# Altium PCB MBLPS_Transreceiver_PCB_2.PcbDoc
Units mm, origin at the board's own origin, x right, y up, seen from the top; angles counter-clockwise.
Board outline 69.6 x 59.69 mm, 2 copper layers (Top Layer, Bottom Layer); 32 components, 25 nets, 146 pads, 8 vias.
Unrouted connection lines stored in the file: 2.
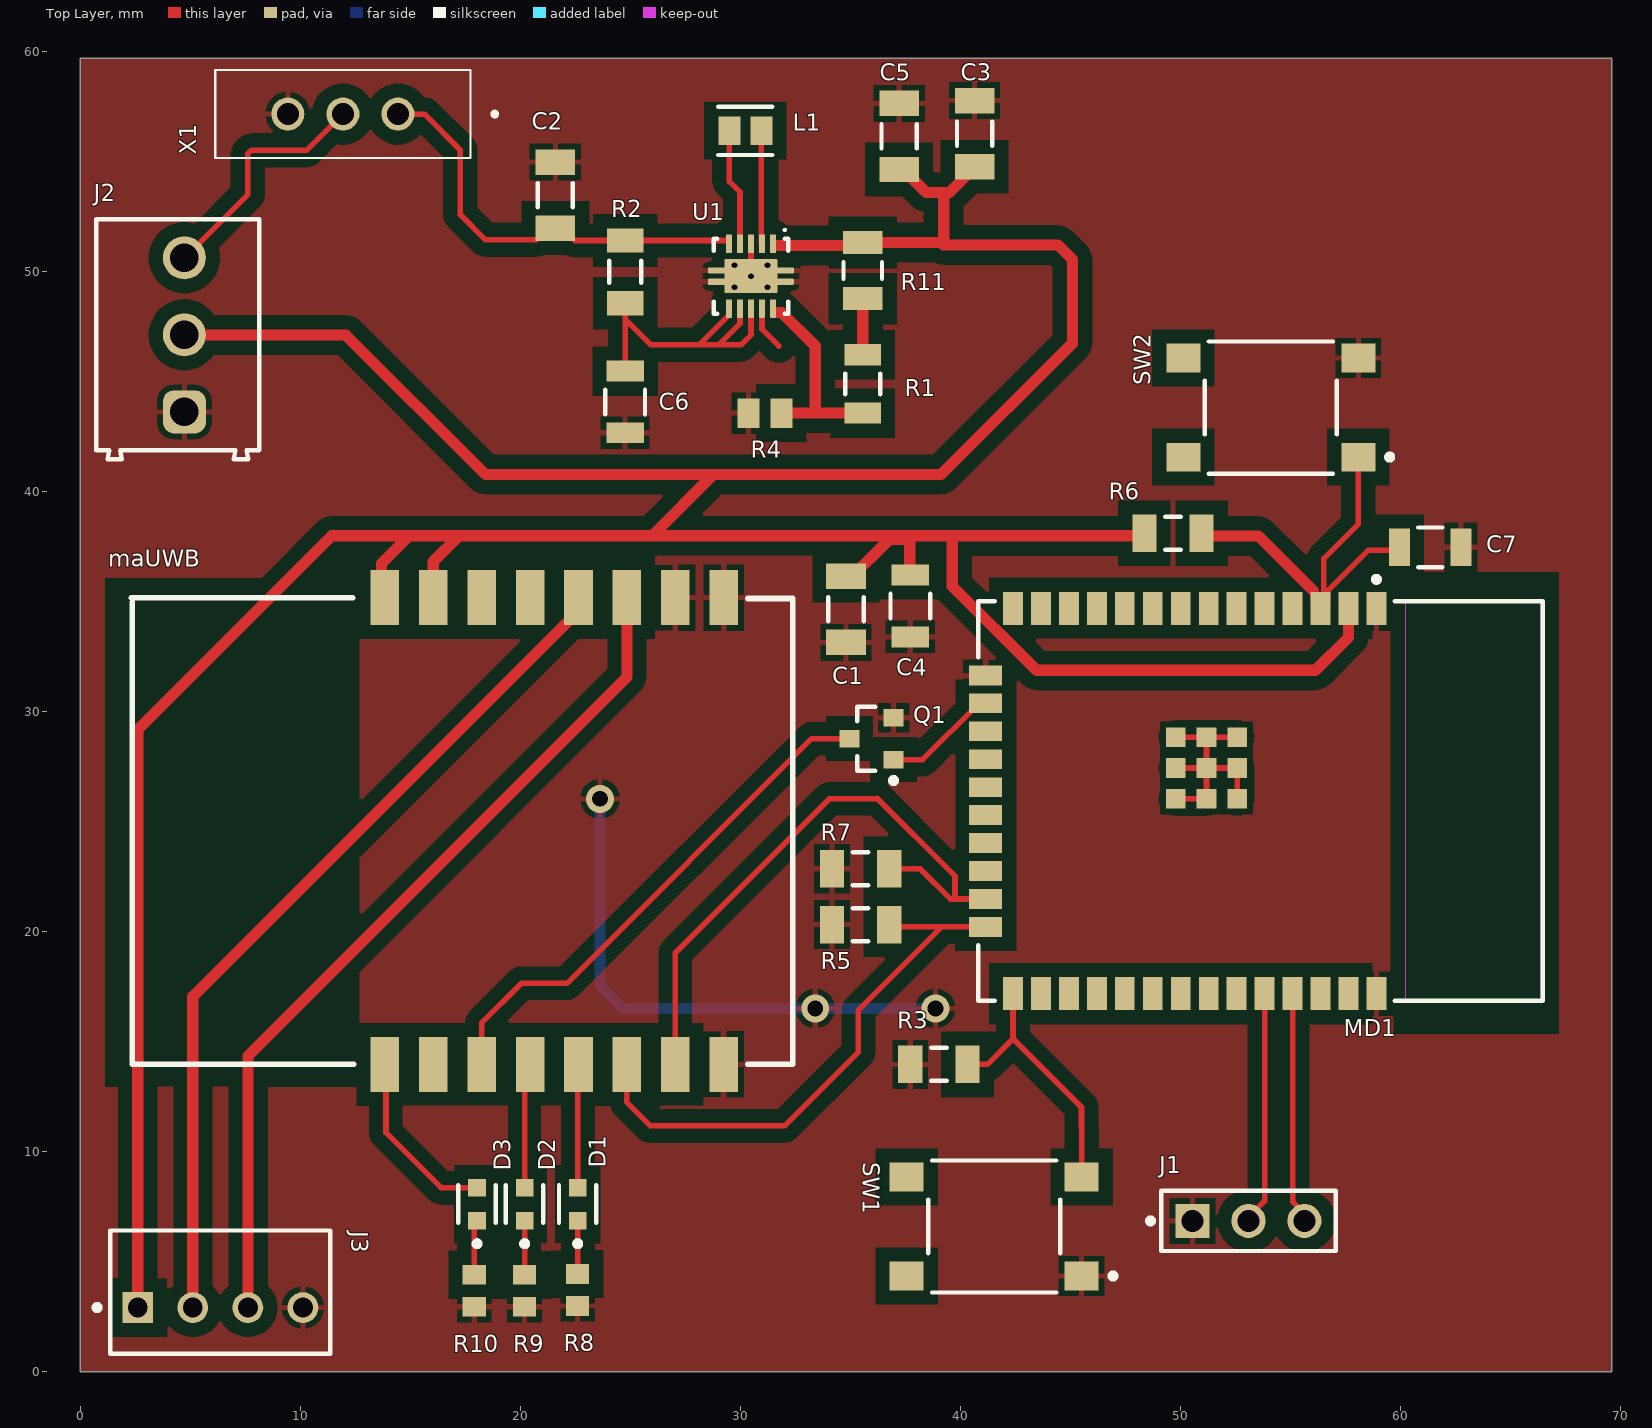
[diagram p0: Top Layer view]
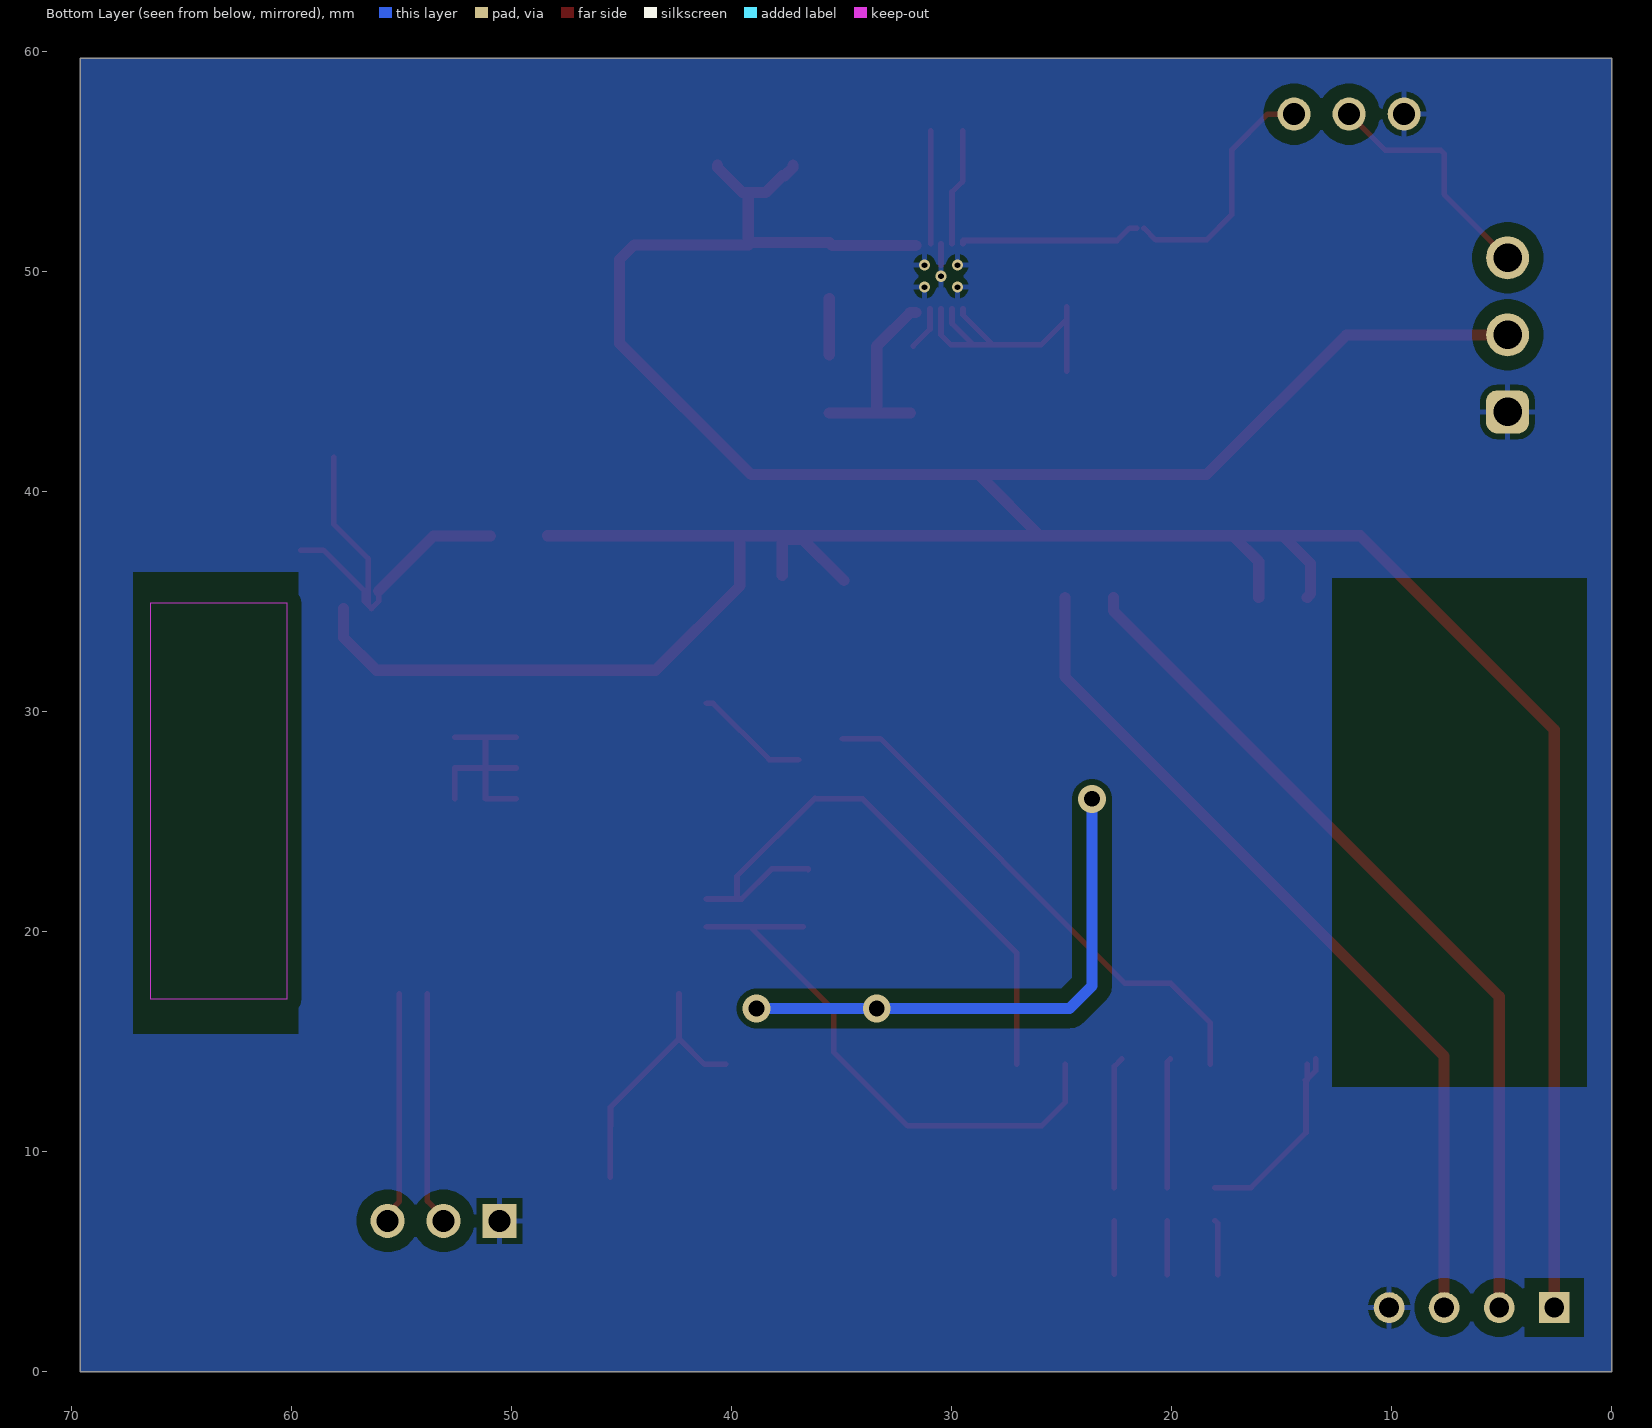
[diagram p1: Bottom Layer view, seen from below]

## Layer stack, top to bottom
Top Solder: solder mask 0.0102, Solder Resist, Dk 3.5
Top Layer: signal copper 0.0356
Dielectric 1: dielectric 0.32, FR-4, Dk 4.8
Bottom Layer: signal copper 0.0356
Bottom Solder: solder mask 0.0102, Solder Resist, Dk 3.5

## Board outline
0,59.69 0,0 69.596,0 69.596,59.69

## Design rules (kind name [scope] priority, off if disabled: settings)
Clearance Clearance_POLY [InNamedPolygon('GND_L01_P000') or InNamedPolygon('GND_L02_P001')] p1: gap=0.635 ignorepadtopadclearanceinfootprint=FALSE
Clearance [All] p2: gap=0.127 ignorepadtopadclearanceinfootprint=FALSE
HoleSize [All] p1: absolutevalues=TRUE maxlimit=6.35 minlimit=0.254 maxpercent=80.000 minpercent=20.000
MinimumSolderMaskSliver [All] p1: minsoldermaskwidth=0.076
PolygonConnect [All] p1: connectstyle=Relief reliefconductorwidth=0.254 reliefentries=4 polygonreliefangle="90 Angle" airgapwidth=0.254
RoutingVias [All] p1: holewidth=0.381 width=0.889 viastyle="Through Hole" minholewidth=0.254 minwidth=0.483 maxholewidth=0.711 maxwidth=1.27
SolderMaskExpansion [All] p1: expansion=0.102 istentingtop=FALSE
SupplyNets "Schematic Supply Nets" [InNet('GND')] p1: voltage=0.000
Width [All] p1: maxlimit=6.35 minlimit=0.127 preferedwidth=0.254
28 further rules are at their usual default settings.

## Components (designator, comment, footprint, x,y, rotation, side; value= is the part's Value field where it differs from the comment)
C1 "10uF" CAPC1206(3216)190_N 34.798,34.647 r270 top
C2 "10uF" CAPC1206(3216)190_N 21.59,53.467 r270 top
C3 "10uF" CAPC1206(3216)190_N 40.64,56.261 r270 top
C4 "0.1 uF" FP-C1206C-EB-MFG 37.719,34.798 r270 top value="0.10 μF"
C5 "10uF" CAPC1206(3216)190_N 37.211,56.134 r270 top
C6 "0.1 uF" FP-C1206C-EB-MFG 24.765,44.069 r90 top value="0.10 μF"
C7 "0.1 uF" FP-C1206C-EB-MFG 61.341,37.465 r180 top value="0.10 μF"
D1 "RX LED" FP-LTST-C190GKT-MFG 22.606,7.62 r90 top
D2 "TX LED" FP-LTST-C190GKT-MFG 20.193,7.62 r90 top
D3 "RUN LED" FP-LTST-C190GKT-MFG 18.034,7.62 r90 top
J1 "PREC003SAAN-RC" FP-PREC003SAAN-RC-MFG 53.086,6.858 r0 top
J2 "691214110003" 691214110003 4.437,47.117 r90 top
J3 "Firmware Header" FP-B4P-SHF-1AA_LF_SN-MFG 6.37,3.621 r0 top
L1 "2.2 Uh" FP-LQM21PH_G0-IPC_C 30.226,56.388 r0 top
maUWB "maUWB" PCBComponent_1 32.243,13.97 r90 top
MD1 "ESP32-WROOM-32D (8MB)" FP-ESP32-WROOM-32D_8MB-MFG 53.638,25.935 r270 top
Q1 "MMUN2233LT1G" ONSC-SOT-23-3-318-08_V 35.957,28.768 r180 top
R1 "1.1Mohm" FP-CRCW1206-e3-IPC_C 35.56,44.887 r270 top
R2 "100 Ohms" RESC3216X70X50NL05T20 24.765,49.981 r90 top
R3 "ERA8AEB103V" RESC3216X70X50LL20T25 39.019,13.97 r180 top
R4 "200 kOhms" RESC2013X60X40LL20T25 31.115,43.561 r0 top
R5 "ERA8AEB103V" RESC3216X70X50LL20T25 35.463,20.32 r180 top
R6 "ERA8AEB103V" RESC3216X70X50LL20T25 49.657,38.1 r180 top
R7 "ERA8AEB103V" RESC3216X70X50LL20T25 35.463,22.86 r180 top
R8 "1.5 kOhm" RESC1608X55X30ML15T15 22.606,3.72 r90 top
R9 "1.5 kOhm" RESC1608X55X30ML15T15 20.193,3.683 r90 top
R10 "1.5 kOhm" RESC1608X55X30ML15T15 17.907,3.683 r90 top
R11 "20 kOhm" FP-CRCW1206-e3-MFG 35.56,50.038 r90 top
SW1 "Boot Push Button" FP-PTS645SM43SMTR92LFS-MFG 41.529,6.604 r180 top
SW2 "Enable Push Button" FP-PTS645SM43SMTR92LFS-MFG 54.102,43.815 r180 top
U1 "TPS63000DRCR" DRC0010J_V 30.48,49.784 r270 top
X1 "Component_1" EG1218 14.438,57.15 r180 top

## Footprints (in the part's own frame and the unit in brackets; to place one, negate y for a bottom-side part, rotate by r counter-clockwise, add the part's x,y. Pads: shape width x height; smd on the part's side, far side on the other; paste and mask are expansions set on the pad)
691214110003 [mm] "3.50 mm Horizontal Entry Modular, 3p"
  rrect50% 1.95x1.95 hole 1.3: 1(-3.5,-0.3)
  round 1.95 hole 1.3: 2(0,-0.3) 3(3.5,-0.3)
  silkscreen extent -5.65,-3.7 5.25,3.7, body extent -5.7,-3.7 5.25,3.7, height 8.55
CAPC1206(3216)190_N [mm] "Chip Capacitor, Body 3.2x1.6mm, Height 1.9mm, IPC Medium Density"
  rect 1.15x1.8 smd: 1(-1.5,0) 2(1.5,0)
  silkscreen extent -0.55,-0.8 0.55,0.8, body extent -1.7,-0.9 1.7,0.9, height 1.9
DRC0010J_V [mm] "SON, 10-Leads, Body 3x3mm, Pitch 0.5mm, Thermal Pad 2.4x1.65mm, TI Recommended"
  rrect36% 0.85x0.28 smd paste-0.025 mask+0.07: 1(-1.475,1) 2(-1.475,0.5) 3(-1.475,0) 4(-1.475,-0.5) 5(-1.475,-1) 6(1.475,-1) 7(1.475,-0.5) 8(1.475,0) 9(1.475,0.5) 10(1.475,1)
  rrect36% 0.28x0.85 smd paste-0.025 mask+0.07: 11(-0.254,1.524) 11(-0.254,-1.524) 11(0.254,1.524) 11(0.254,-1.524)
  rrect6% 1.548x2.4 smd paste-0.825 mask+0.07: 11(0,0)
  silkscreen extent -2.15,-1.7 1.7,1.7, body extent -1.55,-1.55 1.55,1.55, height 1
EG1218 [mm]
  round 1.5 hole 1: 1(0,0) 2(2.5,0) 3(5,0)
  silkscreen extent -4.5,-2 8.3,2
FP-B4P-SHF-1AA_LF_SN-MFG [mm]
  rect 1.4x1.4 hole 0.9 paste-2539.97 mask+0: 1(-3.75,-0.7)
  round 1.4 hole 0.9 paste-2539.97 mask+0: 2(-1.25,-0.7) 3(1.25,-0.7) 4(3.75,-0.7)
  silkscreen extent -5.72,-2.8 5,2.8, body extent -5.1,-2.9 5.1,2.9, height 0.25
FP-C1206C-EB-MFG [mm]
  rect 0.95x1.7 smd paste+0 mask+0: 1(-1.4,0) 2(1.4,0)
  silkscreen extent -0.55,-0.9 0.55,0.9, body extent -2,-1 2,1, height 0.25
FP-CRCW1206-e3-IPC_C [mm]
  rect 0.956x1.658 smd paste+0 mask+0: 1(-1.326,0) 2(1.326,0)
  silkscreen extent -0.47,-0.8 0.47,0.8, body extent -1.9,-0.97 1.9,0.97, height 0.25
FP-CRCW1206-e3-MFG [mm]
  rect 1.05x1.8 smd paste+0 mask+0: 1(-1.275,0) 2(1.275,0)
  silkscreen extent -0.38,-0.87 0.38,0.87, body extent -1.9,-1 1.9,1, height 0.25
FP-ESP32-WROOM-32D_8MB-MFG [mm]
  rect 1.5x0.9 smd paste+0 mask+0: 1(-8.75,5.26) 2(-8.75,3.99) 3(-8.75,2.72) 4(-8.75,1.45) 5(-8.75,0.18) 6(-8.75,-1.09) 7(-8.75,-2.36) 8(-8.75,-3.63) 9(-8.75,-4.9) 10(-8.75,-6.17) 11(-8.75,-7.44) 12(-8.75,-8.71) 13(-8.75,-9.98) 14(-8.75,-11.25) 25(8.75,-11.25) 26(8.75,-9.98) 27(8.75,-8.71) 28(8.75,-7.44) 29(8.75,-6.17) 30(8.75,-4.9) 31(8.75,-3.63) 32(8.75,-2.36) 33(8.75,-1.09) 34(8.75,0.18) 35(8.75,1.45) 36(8.75,2.72) 37(8.75,3.99) 38(8.75,5.26)
  rect 0.9x1.5 smd paste+0 mask+0: 15(-5.71,-12.5) 16(-4.44,-12.5) 17(-3.17,-12.5) 18(-1.9,-12.5) 19(-0.63,-12.5) 20(0.64,-12.5) 21(1.91,-12.5) 22(3.18,-12.5) 23(4.45,-12.5) 24(5.72,-12.5)
  rect 0.9x0.9 smd paste+0 mask+0: 39(-2.9,-2.46) 39(-2.9,-1.06) 39(-2.9,-3.86) 39(-1.5,-1.06) 39(-1.5,-2.46) 39(-1.5,-3.86) 39(-0.1,-1.06) 39(-0.1,-2.46) 39(-0.1,-3.86)
  Keep-Out Layer region: -9,6.56 9,6.56 9,12.75 -9,12.75
  Keep-Out Layer region: -9,6.56 9,6.56 9,12.75 -9,12.75
  silkscreen extent -10.2,-12.83 9.08,12.83, body extent -9.6,-13.35 9.6,12.93, height 0.25
FP-LQM21PH_G0-IPC_C [mm]
  rect 1.006x1.308 smd paste+0 mask+0: 1(-0.726,0) 2(0.726,0)
  silkscreen extent -1.23,-1.1 1.23,1.1, body extent -1.33,-0.8 1.33,0.8, height 0.25
FP-LTST-C190GKT-MFG [mm]
  rect 0.8x0.8 smd paste+0 mask+0: 1(-0.75,0) 2(0.75,0)
  silkscreen extent -1.92,-0.85 0.85,0.85, body extent -1.25,-0.55 1.25,0.55, height 0.25
FP-PREC003SAAN-RC-MFG [mm]
  rect 1.55x1.55 hole 1 paste-2539.97 mask+0: 1(-2.54,0)
  round 1.55 hole 1 paste-2539.97 mask+0: 2(0,0) 3(2.54,0)
  silkscreen extent -4.57,-1.37 3.96,1.37, body extent -4.06,-1.47 4.06,1.47, height 0.25
FP-PTS645SM43SMTR92LFS-MFG [mm]
  rect 1.55x1.3 smd paste+0 mask+0: 1(-3.975,2.25) 2(3.975,2.25) 3(-3.975,-2.25) 4(3.975,-2.25)
  silkscreen extent -5.53,-3 3,3, body extent -4.85,-3.1 4.85,3.1, height 0.25
ONSC-SOT-23-3-318-08_V [mm] "SOT23, 3-Leads, Body 2.92x1.3mm, Pitch 0.95mm"
  rect 0.9x0.8 smd: 1(-1,0.95) 2(-1,-0.95) 3(1,0)
  silkscreen extent -1.13,-1.46 0.65,2.02, body extent -0.65,-1.46 0.65,1.46, height 1.11
PCBComponent_1 [mm]
  rect 2.5x1.3 smd: 1(21.209,18.4) 2(21.209,16.2) 3(21.209,14) 4(21.209,11.8) 5(21.209,9.6) 6(21.209,7.4) 7(21.209,5.2) 8(21.209,3) 9(0,18.4) 10(0,16.2) 11(0,14) 12(0,11.8) 13(0,9.6) 14(0,7.4) 15(0,5.2) 16(0,3)
  silkscreen extent 0,-0.13 21.21,29.92
RESC1608X55X30ML15T15 [mm] "Chip Resistor, 2-Leads, Body 1.60x0.80mm, IPC Low Density"
  rect 0.9x1.05 smd: 1(-0.725,0) 2(0.725,0)
  body extent -0.87,-0.48 0.87,0.48, height 0.55
RESC2013X60X40LL20T25 [mm] "Chip Resistor, 2-Leads, Body 2.00x1.25mm, IPC High Density"
  rect 1x1.35 smd: 1(-0.75,0) 2(0.75,0)
  body extent -1.1,-0.72 1.1,0.72, height 0.6
RESC3216X70X50LL20T25 [mm] "Chip Resistor, 2-Leads, Body 3.20x1.60mm, IPC High Density"
  rect 1.1x1.7 smd: 1(-1.3,0) 2(1.3,0)
  silkscreen extent -0.35,-0.75 0.35,0.75, body extent -1.7,-0.9 1.7,0.9, height 0.7
RESC3216X70X50NL05T20 [mm] "Chip Resistor, 2-Leads, Body 3.20x1.60mm, IPC Medium Density"
  rect 1.1x1.65 smd: 1(-1.425,0) 2(1.425,0)
  silkscreen extent -0.5,-0.72 0.5,0.72, body extent -1.63,-0.82 1.62,0.82, height 0.7

## Part data
C1 C2 C3 C5: library part CMP-1037-04961-1, "CAP 10uF 6.3V ±10% 1206 (3216 Metric) Thickness 1.9mm SMD", Case-EIA=1206, Case-Metric=3216, Rated Voltage="6.3 V", Tolerance=Â±10%, Max Thickness="1.9 mm", Technology=SMT
C4 C6 C7: library part CMP-03020-000153-1, "CAP CER 0.1UF 100V X7R 1206", Capacitance="0.10 μF", Manufacturer=KEMET, Manufacturer Part Number=C1206C104K1RACTU, Package=C1206C-EB, Temperature="-55°C to +150°C", Temperature Characteristic=X7R, Temperature Coefficient=15%, Temperature Range High=+150°C, Temperature Range Low=-55°C, Tolerance=0.1, Voltage Rating="100 V", Automotive=Yes, Automotive Grade="Grade 0", Category=Cap, ComponentLink2Description=Datasheet, ComponentLink2URL=https://content.kemet.com/datasheets/KEM_C1007_X8R_ULTRA_150C_SMD.pdf, Device Class L1="Passive Components", Device Class L2=Capacitors, Device Class L3="Ceramic Capacitors", Digikey Description="CAP CER 0.1UF 100V X7R 1206", Height=0.88mm, Ipc Land Pattern Name=CAPC320160X78, Lead Free=Yes, Material=Ceramic, Mouser Description="CAP CER 0.1UF 100V X7R 1206", Octopart=https://octopart.com/c1206c104k1ractu-kemet-89521, RoHS=TRUE
D1 D2 D3: library part CMP-22017-000005-2, "LED GREEN CLEAR CHIP SMD", Case Code (Imperial)=0603, Case Code (Metric)=1608, Color=Green, Forward Current=30mA, Forward Voltage=2.1V, Lens Color=Colorless, Max Operating Temperature=85°C, Min Operating Temperature=-55°C, Package Quantity=1, Power Dissipation=100mW, Reverse Voltage=5V, Test Current=10mA, Voltage=2V, Case/Package=0603, Depth=0.8mm, Dominant Wavelength=569nm, Height=0.8mm, Illumination Color=Green, Lead Free="Lead Free", Length=1.6mm, Lens Style=Clear, Lens Transparency=Clear, Luminous Intensity=6mcd, Mount="Surface Mount", Number of Elements=1, Number of LEDs=1, Number of Pins=2, Packaging="Tape and Reel", Power Rating=100mW, Radiation Hardening=No, Viewing Angle=130°, Wavelength=565nm, Width=0.8mm
J1: library part CMP-00595-22265080-1, "PREC003SAAN-RC Conn Header Vert 3POS 2.54MM", Color=Black, Current Rating=3A, Max Operating Temperature=105°C, Min Operating Temperature=-40°C, Connector Type="Male Pin", Contact Material="Nickel, Tin", Contact Mating Length=5.842mm, Contact Plating=Tin, Height=8.74mm, Mount="Through Hole", NexarPartId=22265080, Number of Contacts=3, Number of Positions=3, Number of Rows=1, Packaging=Bulk, Pitch=2.54mm, RoHS=Compliant, Termination=Solder
J2: library part CMP-1502-02466-2, Color="Blue, Green", Current=10A, Max Operating Temperature=105°C, Min Operating Temperature=-40°C, Voltage=300V, Contact Material=Brass, Contact Plating="Brass, Tin", Current Rating=10A, Height=12.2mm, Housing Material=Nylon, Lead Pitch=3.5mm, Length=7.4mm, Mount="Through Hole", NexarPartId=18818289, Number of Contacts=3, Number of Levels=1, Number of Pins=3, Number of Positions Per Level=3, Packaging=Box, Pitch=3.5052mm, Plating="Brass, Steel", REACH SVHC=Unknown, RoHS=Compliant, Stripping Length=-6mm, Termination=Screw, Voltage Rating=300V, Width=10.9mm, Wire Gauge (Max)=24AWG, Wire Gauge (Min)=16AWG, Wire/Cable Gauge=24AWG
J3: library part CMP-17439-000200-1, "CONN HEADER VERT 4POS 2.5MM", Color=Natural, Contact Resistance=20mR, Current Rating=3A, Flammability Rating="UL94 V-0", Max Operating Temperature=85°C, Max Voltage Rating (AC)=250V, Min Operating Temperature=-25°C, Connector Type=Header, Contact Finish - Mating=TIN, Contact Material=Brass, Contact Mating Length=0.236inch, Contact Plating=Tin, Contact Shape=Square, Contact Type="Male Pin", Depth=5.6mm, Fastening Type=Friction, Housing Color=Natural, Housing Material=Polyamide, Insulation Color=Natural, Insulation Material=Nylon, Lead Free="Lead Free", Mated Stacking Heights=14.9mm, Max Current Rating=3A, Mount="Through Hole", Number of Contacts=4, Number of Positions=4, Number of Rows=1, Orientation=Straight, Packaging=Bulk, Pitch=2.5mm, Series=NH, Termination=Solder, Voltage Rating=250V
L1: library part CMP-06042-016317-1, "Multilayer Type Inductor for Power Lines, 0805 (2012), 2.2μH, 30%, 0.288Ω, 0.8A", Case Code (Imperial)=0805, Case Code (Metric)=2012, Current Rating=800mA, DC Resistance (DCR)=288mR, Inductance=2.2uH, Inductance Tolerance=30%, Max Operating Temperature=125°C, Min Operating Temperature=-55°C, Package Quantity=4000, Self Resonant Frequency=40MHz, Test Frequency=1MHz, Case/Package=0805, Core Material=Ferrite, DC Current=800mA, Depth=1.4mm, Height=0.9mm, Height - Seated (Max)=0.039inch, Lead Free="Lead Free", Length=2mm, Max DC Current=800mA, Military Standard=Not, Mount="Surface Mount", Packaging="Tape and Reel", Radiation Hardening=No, REACH SVHC="No SVHC", RoHS Compliant=Yes, Series=LQM, Shielding=Shielded, Termination=SMD/SMT, Tolerance=30%, Width=0.049inch
MD1: library part CMP-194065-000011-1, "RX TXRX MOD WIFI TRACE ANT SMD", Case/Package=SMD/SMT, Frequency=2.5GHz, Max Operating Temperature=85°C, Min Operating Temperature=-40°C, Data Rate=150Mbps, Interface=I2C, Memory Size=536KB, Mount="Surface Mount", Packaging="Tape and Reel", Sensitivity=-98dBm
Q1: library part CMP-0630-00250-1, "Digital Transistor (BRT), R1=4.7 kOhm, R2=47 kOhm, NPN Transistor, 3-Pin SOT-23, Pb-Free, Tape and Reel", Manufacturer="On Semiconductor", ComponentLink1Description="Manufacturer URL", ComponentLink1URL=http://www.onsemi.com/, ComponentLink2Description=Datasheet, ComponentLink2URL=http://www.onsemi.cn/pub_link/Collateral/DTC143Z-D.PDF, ComponentLink3Description="Package Specification", ComponentLink3URL=http://www.onsemi.cn/pub_link/Collateral/318-08.PDF, DatasheetVersion="Rev. 4", hFE Min=80, IC Continuous (A)=0.1, Mounting Technology="Surface Mount", PackageDescription="3-Pin Small Outline Transistor, Body 2.92 x 1.3 mm, Pitch 0.95 mm", PackageReference=SOT-23-3-318-08, PackageVersion="Rev. AP, 11/2009", Packing="Tape and Reel", PartNumber=MMUN2233LT1G, Polarity=NPN, RoHS=TRUE, V(BR)CEO Min (V)=50
R1: library part CMP-1014-00147-3, "RES Thick Film, 1.1MΩ, 5%, 0.25W, 200ppm/°C, 1206", Case Code (Imperial)=1206, Case Code (Metric)=3216, Max Operating Temperature=155°C, Max Power Dissipation=250mW, Min Operating Temperature=-55°C, Package Quantity=1, Resistance=1.1MR, Resistor Type="Thick Film", Temperature Coefficient=200ppm/°C, Tolerance=5%, Voltage Rating=200V, Case/Package=1206, Construction=Rectangular, Contact Plating=Tin, Depth=1.6mm, Features="Automotive AEC-Q200", Height=0.024inch, Lead Free="Lead Free", Length=3.2mm, Military Standard=Not, Number of Pins=2, Number of Terminations=2, Packaging="Tape and Reel", Power Rating=250mW, Radiation Hardening=No, RoHS Compliant=Yes, Series=CRCW, Termination=SMD/SMT, Voltage Rating (DC)=200V, Weight=0.000353oz, Width=0.063inch
R2: library part CMP-2003-00016-1, Manufacturer=Panasonic, Part Number=ERJ-8ENF1000V
R3 R5 R6 R7: library part CMP-2003-04407-1, Manufacturer=Panasonic, Part Number=ERA8AEB103V
R4: library part CMP-2001-00611-1, Manufacturer=Panasonic, Part Number=ERA6AEB204V
R8 R9 R10: library part CMP-1012-00528-2, Manufacturer=Panasonic, Part Number=ERJ-3EKF1501V
R11: library part CMP-2003-01940-2, "RES Thick Film, 20kΩ, 1%, 0.25W, 100ppm/°C, 1206", Case Code (Imperial)=1206, Case Code (Metric)=3216, Max Operating Temperature=155°C, Max Power Dissipation=250mW, Min Operating Temperature=-55°C, Package Quantity=10, Resistance=20kR, Temperature Coefficient=100ppm/°C, Tolerance=1%, Voltage Rating=200V, Case/Package=1206, Composition="Thick Film", Contact Plating=Tin, Depth=1.6mm, Features="Automotive AEC-Q200", Height=0.55mm, Lead Free="Lead Free", Length=3.2mm, Military Standard=Not, Mount="Surface Mount", Number of Pins=2, Number of Terminations=2, Packaging="Tape and Reel", Power Rating=250mW, Radiation Hardening=No, Termination=SMD/SMT, Voltage Rating (DC)=200V, Weight=0.000353oz, Width=0.063inch, Working Voltage=200V
SW1 SW2: library part CMP-2000-05160-2, "SWITCH TACTILE SPST-NO 0.05A 12V", Case/Package=SMD/SMT, Color=Black, Contact Resistance=100mR, Current Rating=50mA, Max Operating Temperature=60°C, Max Voltage Rating (DC)=12V, Min Operating Temperature=-20°C, Operating Force=160gf, Package Quantity=1, Actuator Length=0.85mm, Actuator Material=Nylon, Actuator Type=Standard, Contact Material=Silver, Contact Plating=Silver, Depth=9mm, Illumination Type=Non-Illuminated, Lead Free="Lead Free", Length=6mm, Max Current Rating=50mA, Mechanical Life=100000Cycles, Mount="Surface Mount", Orientation=Straight, Packaging="Tape and Reel", REACH SVHC="No SVHC", Switch Function=Off-Mom, Termination="Gull Wing", Throw Configuration=SPST, Voltage Rating (DC)=12V
U1: library part CMP-0345-00001-2, "Buck-Boost Voltage Converter with 1.8 to 5.5 V Input and 1.2 to 5.5 V Output, -40 to 85 degC, 10-Pin SON (DRC), Green (RoHS & no Sb/Br)", Dynamic Voltage Scaling=TRUE, Manufacturer="Texas Instruments", Switching Frequency(Max)(kHz)=1500, ComponentLink1Description=Datasheet, ComponentLink1URL=http://www.ti.com/general/docs/lit/getliterature.tsp?genericPartNumber=TPS63000&fileType=pdf, ComponentLink2Description="Package Specification", ComponentLink2URL=http://www.ti.com/litv/pdf/mpds117k, DatasheetVersion=SLVS520B, Eco-Plan="Green (RoHS & no Sb/Br)", Iout(Max)(A)=1.2, Iq(Typ)(mA)=0.04, Mounting Technology="Surface Mount", PackageDescription="10-Pin Plastic Small Outline No-Lead, 3 x 3 x 1 mm Body, 0.5 mm Pitch, Exposed Pad", PackageReference=DRC0010J, PackageVersion="revL, Sep-2011", PartNumber=TPS63000DRCR, Regulated Outputs(#)=1, SubFamily="Buck-Boost Regulator", Synchronous Rectification=TRUE, Topology=Buck-Boost, Vin(Max)(V)=5.5, Vin(Min)(V)=1.8, Vout(Max)(V)=5.5, Vout(Min)(V)=1.2

## Via types
v1: diameter 0.5, hole 0.254, Top Layer to Bottom Layer, 4 vias
v2: diameter 1.27, hole 0.711, Top Layer to Bottom Layer, 3 vias
v3: diameter 0.508, hole 0.254, Top Layer to Bottom Layer, 1 vias

## Nets (pads, with @x,y where several pads share a name; then routed paths per layer and width w, separated by ;. In a path a pad name is that pad's centre, name@x,y a point inside that pad or via, vN(x,y) a via of type N, cw(c..) or ccw(c..) an arc to the next point about the centre after c; other vN are vias at no path point)
GND: C1.2 C2.1 C3.1 C4.2 C5.1 C6.1 C7.1 J1.1 J2.1 J3.4 maUWB.7 maUWB.8 maUWB.16 MD1.1 MD1.15 MD1.38 MD1.39 Q1.2 R3.2 R4.1 R5.2 R7.2 R8.1 R9.1 R10.1 SW1.1 SW2.3 U1.3 U1.9 U1.11 X1.3 | length 38.4
  Top Layer w0.254: U1.11@30.48,50.284 U1.3 ; U1.9 30.98,47.379 31.75,46.609 ; MD1.39@49.778,26.035 51.178,26.035 MD1.39@51.178,27.435 ; MD1.39@49.778,27.435 MD1.39@51.178,27.435 ; MD1.39@49.778,28.835 MD1.39@51.178,28.835 ; MD1.39@52.578,26.035 52.578,27.435 MD1.39@51.178,27.435 ; MD1.39@52.578,28.835 MD1.39@51.178,28.835 ; MD1.39@51.178,27.435 MD1.39@51.178,28.835
  Bottom Layer w0.508: v2(23.622,26.035) 23.622,17.526 24.638,16.51 v2(33.401,16.51) v2(38.862,16.51)
  other v1: 29.73,49.284 31.23,49.284 29.73,50.284 31.23,50.284
  other v3: 30.48,49.784
NetC1_1: C1.1 C3.2 C4.1 C5.2 J2.2 J3.1 maUWB.1 maUWB.2 MD1.2 R6.2 R11.2 U1.1 | length 185.3
  Top Layer w0.508: J3.1 2.62,29.178 11.43,37.988 14.94,37.988 ; J2.2 12.065,47.117 18.415,40.767 28.765,40.767 ; maUWB.1 13.686,35.336 13.686,36.733 14.94,37.988 ; maUWB.2 16.043,36.811 17.22,37.988 ; 31.623,51.181 35.428,51.181 R11.2 39.118,51.313 39.236,51.196 ; C1.1@34.894,35.95 36.775,37.831 37.693,37.831 C4.1@37.693,36.195 ; C5.2@37.211,54.824 37.211,54.726 37.59,54.347 37.688,54.347 38.445,53.59 39.236,53.59 ; C3.2@40.64,54.824 40.64,54.726 39.504,53.59 39.236,53.59 ; R6.2@48.357,37.988 39.624,37.988 ; MD1.2 57.628,33.371 56.134,31.877 43.457,31.877 39.624,35.71 39.624,37.988 ; 14.94,37.988 17.22,37.988 ; 17.22,37.988 25.986,37.988 ; 25.986,37.988 36.775,37.988 37.693,37.988 39.624,37.988 ; 25.986,37.988 28.765,40.767 ; 28.765,40.767 39.116,40.767 45.085,46.736 45.085,50.546 44.435,51.196 39.236,51.196 ; 39.236,51.196 39.236,53.59
NetC2_2: C2.2 R2.2 U1.5 X1.1 | length 19.4
  Top Layer w0.254: X1.1 15.641,57.15 17.272,55.519 17.272,52.578 18.415,51.435 20.733,51.435 C2.2@21.265,51.967 ; C2.2 21.915,51.967 22.476,51.406 29.467,51.406 29.48,51.393 U1.5
NetC6_2: C6.2 R2.1 U1.6 U1.7 U1.8 | length 14.8
  Top Layer w0.254: C6.2@24.765,45.466 C6.2 24.765,47.84 ; R2.1@24.765,48.387 24.765,47.84 ; U1.6 29.48,48.024 28.12,46.664 ; U1.7 29.98,47.633 29.011,46.664 ; U1.8 30.48,47.117 30.027,46.664 29.011,46.664 ; 24.765,47.84 25.942,46.664 28.12,46.664 ; 28.12,46.664 29.011,46.664
NetC7_2: C7.2 MD1.3 R6.1 SW2.1 | length 19
  Top Layer w0.254: 56.035,35.477 56.035,35.008 MD1.3 MD1.3@56.515,34.842 ; SW2.1 58.077,38.519 56.515,36.957 MD1.3@56.515,34.842 ; C7.2@59.56,37.338 58.542,37.338 56.681,35.477 56.681,35.008 MD1.3@56.515,34.842
  Top Layer w0.508: R6.1@50.957,37.973 53.539,37.973 56.035,35.477
NetD1_1: D1.1 R8.2 | length 2.4
  Top Layer w0.254: R8.2 D1.1
NetD1_2: D1.2 maUWB.13 | length 6
  Top Layer w0.254: maUWB.13@22.262,14.224 22.606,13.88 D1.2
NetD2_1: D2.1 R9.2 | length 2.5
  Top Layer w0.254: R9.2 D2.1
NetD2_2: D2.2 maUWB.12 | length 5.9
  Top Layer w0.254: maUWB.12@20.062,14.224 20.193,14.093 D2.2
NetD3_1: D3.1 R10.2 | length 2.5
  Top Layer w0.254: R10.2 17.907,6.743 D3.1
NetD3_2: D3.2 maUWB.9 | length 9.5
  Top Layer w0.254: maUWB.9@13.462,14.224 13.462,13.674 13.885,13.251 maUWB.9@13.934,13.251 ; maUWB.9 13.843,13.251 13.896,13.251 13.896,10.869 16.395,8.37 D3.2
NetJ1_2: J1.2 MD1.34 | length 10.6
  Top Layer w0.254: J1.2 53.086,7.029 53.818,7.761 MD1.34
NetJ1_3: J1.3 MD1.35 | length 10.5
  Top Layer w0.254: MD1.35 55.088,7.747 55.626,7.209 J1.3
NetJ2_3: J2.3 X1.2 | length 11
  Top Layer w0.254: J2.3 7.62,53.5 7.62,55.35 7.769,55.499 10.287,55.499 X1.2
NetJ3_2: J3.2 maUWB.5 | length 39.5
  Top Layer w0.508: J3.2 5.12,17.056 22.643,34.579 maUWB.5
NetJ3_3: J3.3 maUWB.6 | length 39.4
  Top Layer w0.508: J3.3 7.62,14.351 24.843,31.574 maUWB.6
NetL1_1: L1.1 U1.4 | length 5.3
  Top Layer w0.254: L1.1 29.5,54.087 29.98,53.607 U1.4
NetL1_2: L1.2 U1.2 | length 5.1
  Top Layer w0.254: U1.2@30.952,51.259 L1.2
NetmaUWB_11: maUWB.11 Q1.3 | length 23.9
  Top Layer w0.254: maUWB.11 18.243,15.853 20.043,17.653 22.117,17.653 33.232,28.768 Q1.3
NetmaUWB_14: maUWB.14 MD1.24 R5.1 | length 25.7
  Top Layer w0.254: maUWB.14 24.843,13.251 24.843,12.241 25.908,11.176 32.004,11.176 35.357,14.529 35.357,16.434 39.138,20.215 ; R5.1@36.746,20.215 39.138,20.215 ; MD1.24 39.138,20.215
NetmaUWB_15: maUWB.15 MD1.23 R7.1 | length 28.4
  Top Layer w0.254: maUWB.15 27.043,19.042 34.036,26.035 36.195,26.035 36.217,26.057 39.751,22.523 39.751,21.485 ; R7.1@36.514,22.81 36.514,22.86 38.162,22.86 39.538,21.485 39.751,21.485 ; MD1.23 39.751,21.485
NetMD1_25: MD1.25 R3.1 SW1.3 | length 12.2
  Top Layer w0.254: R3.1@40.259,13.97 41.225,13.97 42.388,15.133 ; MD1.25 42.388,15.133 ; SW1.3 45.504,11.14 45.499,11.145 45.499,12.022 42.388,15.133
NetR1_1: R1.1 R11.1 | length 2.5
  Top Layer w0.508: R1.1 R11.1
NetR1_2: R1.2 R4.2 U1.10 | length 9.2
  Top Layer w0.508: 31.623,48.133 31.877,48.133 33.401,46.609 33.401,43.561 ; R4.2 33.401,43.561 ; R1.2 33.401,43.561
RESET: MD1.16 Q1.1 | length 5.2
  Top Layer w0.254: Q1.1 38.281,27.818 40.838,30.375 MD1.16
pads on no net: maUWB.3 maUWB.4 maUWB.10 MD1.4 MD1.5 MD1.6 MD1.7 MD1.8 MD1.9 MD1.10 MD1.11 MD1.12 MD1.13 MD1.14 MD1.17 MD1.18 MD1.19 MD1.20 MD1.21 MD1.22 MD1.26 MD1.27 MD1.28 MD1.29 MD1.30 MD1.31 MD1.32 MD1.33 MD1.36 MD1.37 SW1.2 SW1.4 SW2.2 SW2.4

## Polygon pours and split planes (outlines as drawn)
GND on Bottom Layer "GND_L02_P001" (solid, pour order 1): 0,59.69 0,0 69.596,0 69.596,59.69
GND on Top Layer "GND_L01_P000" (solid, pour order 0): 0,59.69 0,0 69.596,0 69.596,59.69

## Other copper
Multi-Layer:
  pour cut-out: 59.69,36.322 59.69,15.367 67.183,15.367 67.183,36.322
  pour cut-out: 1.143,36.068 1.143,12.954 12.7,12.954 12.7,36.068